# EAGLE board slipringsch (EAGLE 8.4.2)
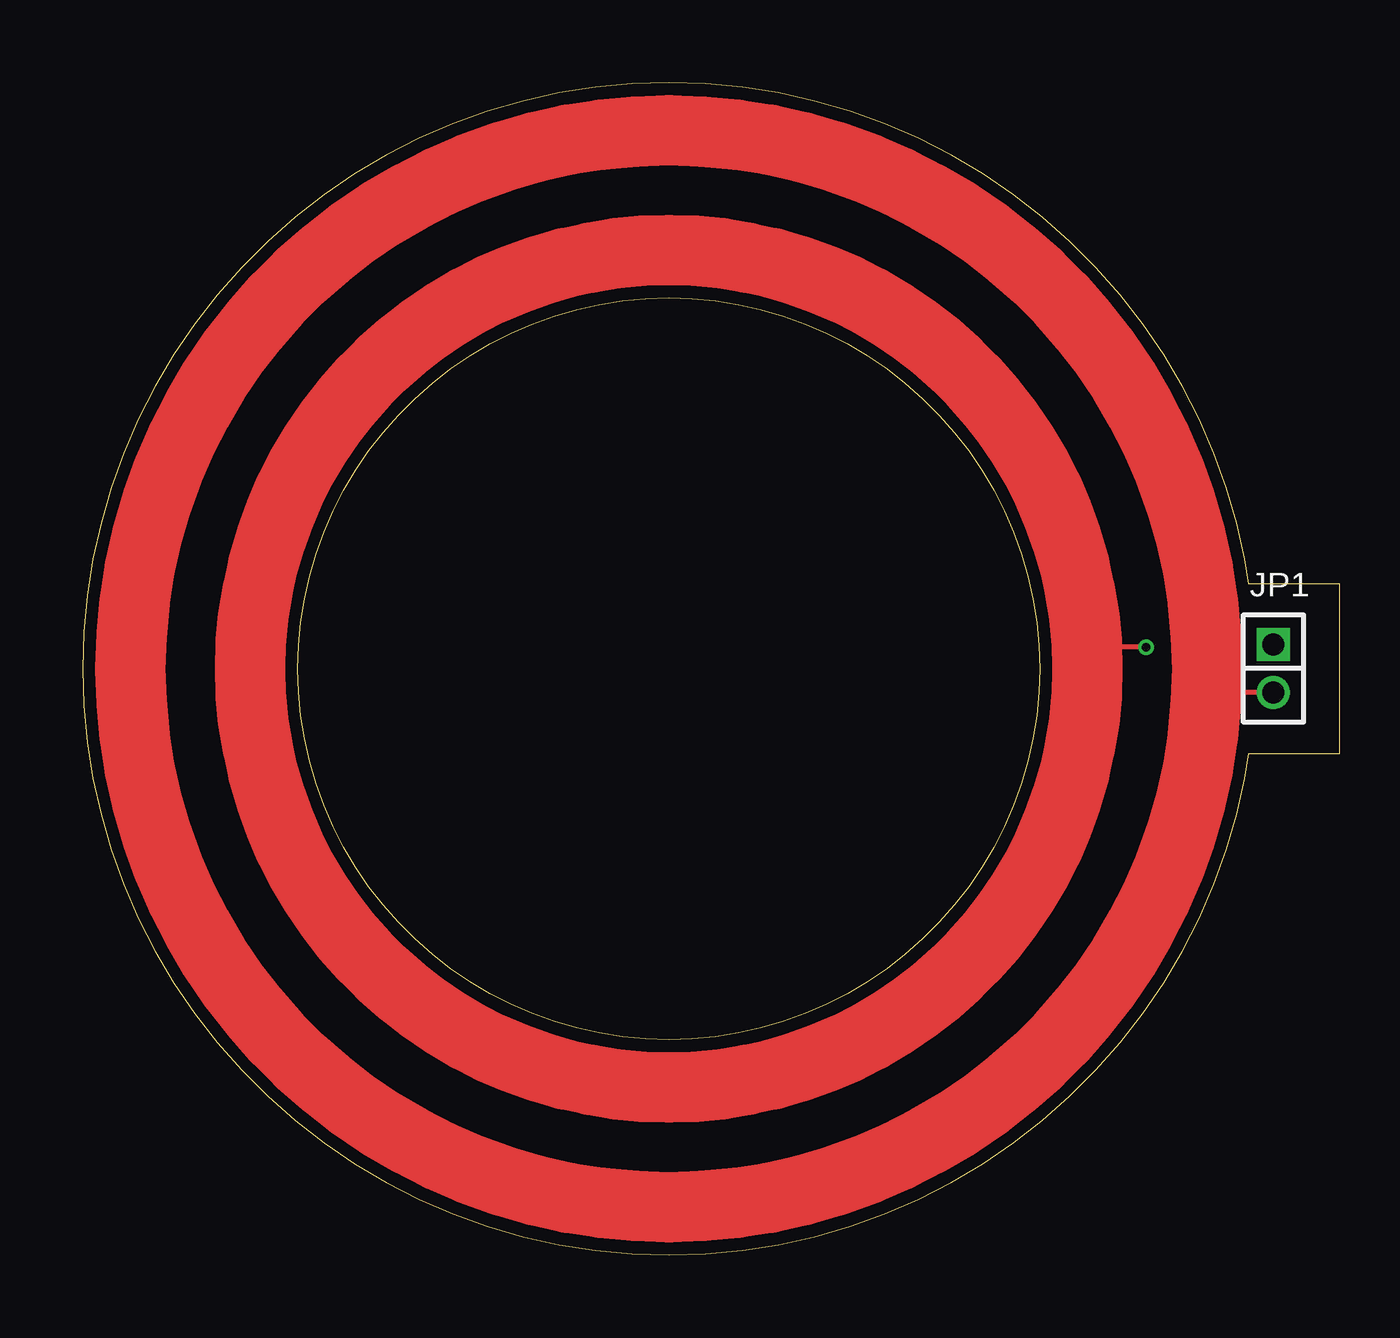
[diagram p0: board, top side]
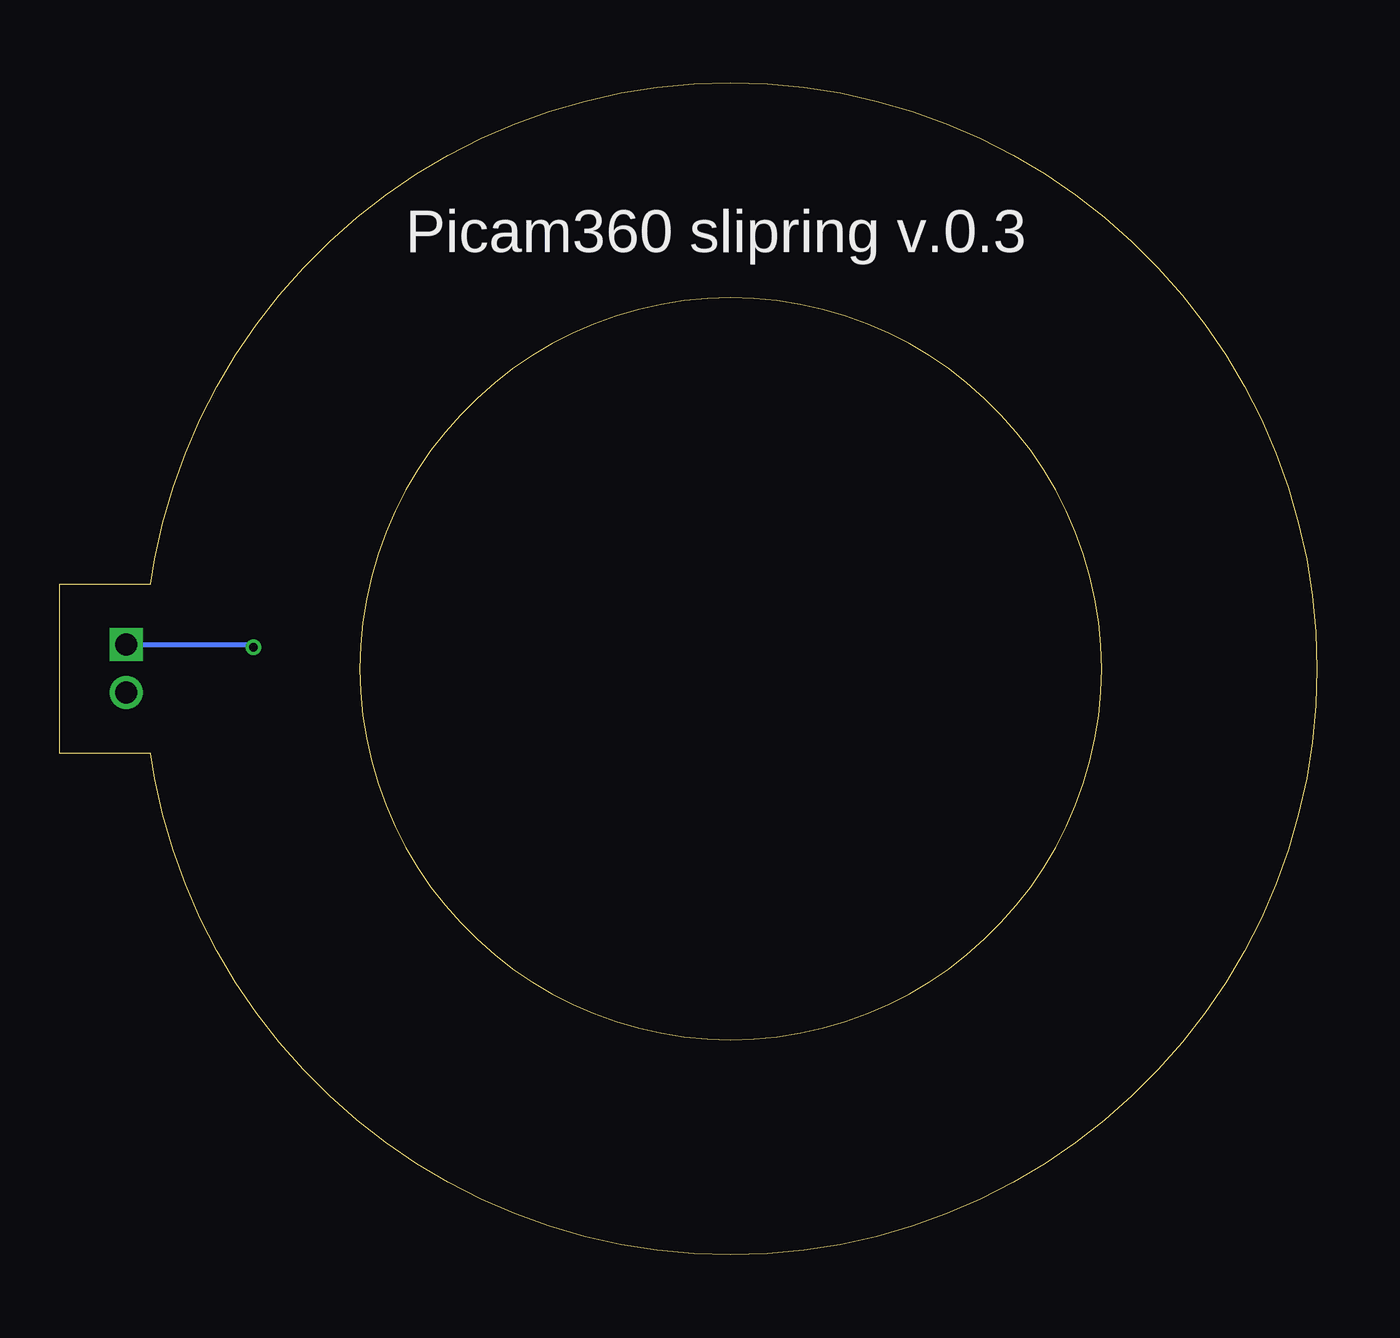
[diagram p1: board, bottom side, seen from below]

Size 52.54 x 49 mm. Coordinates in mm from the lower left corner, seen from the top.
Outline: 26.04,0.05 27.57,0.19 29.09,0.43 30.59,0.77 32.07,1.2 33.52,1.72 34.93,2.33 36.3,3.03 37.63,3.81 38.9,4.68 40.12,5.62 41.27,6.64 42.36,7.73 43.38,8.88 44.32,10.1 45.19,11.37 45.97,12.7 46.67,14.07 47.28,15.48 47.8,16.93 48.23,18.41 48.57,19.91 48.73,20.96 52.54,20.96 52.54,28.04 48.73,28.04 48.57,29.09 48.23,30.59 47.8,32.07 47.28,33.52 46.67,34.93 45.97,36.3 45.19,37.63 44.32,38.9 43.38,40.12 42.36,41.27 41.27,42.36 40.12,43.38 38.9,44.32 37.63,45.19 36.3,45.97 34.93,46.67 33.52,47.28 32.07,47.8 30.59,48.23 29.09,48.57 27.57,48.81 26.04,48.95 24.5,49 22.96,48.95 21.43,48.81 19.91,48.57 18.41,48.23 16.93,47.8 15.48,47.28 14.07,46.67 12.7,45.97 11.37,45.19 10.1,44.32 8.88,43.38 7.73,42.36 6.64,41.27 5.62,40.12 4.68,38.9 3.81,37.63 3.03,36.3 2.33,34.93 1.72,33.52 1.2,32.07 0.77,30.59 0.43,29.09 0.19,27.57 0.05,26.04 0,24.5 0.05,22.96 0.19,21.43 0.43,19.91 0.77,18.41 1.2,16.93 1.72,15.48 2.33,14.07 3.03,12.7 3.81,11.37 4.68,10.1 5.62,8.88 6.64,7.73 7.73,6.64 8.88,5.62 10.1,4.68 11.37,3.81 12.7,3.03 14.07,2.33 15.48,1.72 16.93,1.2 18.41,0.77 19.91,0.43 21.43,0.19 22.96,0.05 24.5,0 26.04,0.05
Outline: 23.53,9.03 22.56,9.12 21.6,9.28 20.64,9.49 19.71,9.76 18.79,10.09 17.9,10.47 17.03,10.92 16.2,11.41 15.39,11.96 14.62,12.56 13.89,13.2 13.2,13.89 12.56,14.62 11.96,15.39 11.41,16.2 10.92,17.03 10.47,17.9 10.09,18.79 9.76,19.71 9.49,20.64 9.28,21.6 9.12,22.56 9.03,23.53 9,24.5 9.03,25.47 9.12,26.44 9.28,27.4 9.49,28.36 9.76,29.29 10.09,30.21 10.47,31.1 10.92,31.97 11.41,32.8 11.96,33.61 12.56,34.38 13.2,35.11 13.89,35.8 14.62,36.44 15.39,37.04 16.2,37.59 17.03,38.08 17.9,38.52 18.79,38.91 19.71,39.24 20.64,39.51 21.6,39.73 22.56,39.88 23.53,39.97 24.5,40 25.47,39.97 26.44,39.88 27.4,39.73 28.36,39.51 29.29,39.24 30.21,38.91 31.1,38.52 31.97,38.08 32.8,37.59 33.61,37.04 34.38,36.44 35.11,35.8 35.8,35.11 36.44,34.38 37.04,33.61 37.59,32.8 38.08,31.97 38.52,31.1 38.91,30.21 39.24,29.29 39.51,28.36 39.73,27.4 39.88,26.44 39.97,25.47 40,24.5 39.97,23.53 39.88,22.56 39.73,21.6 39.51,20.64 39.24,19.71 38.91,18.79 38.52,17.9 38.08,17.03 37.59,16.2 37.04,15.39 36.44,14.62 35.8,13.89 35.11,13.2 34.38,12.56 33.61,11.96 32.8,11.41 31.97,10.92 31.1,10.47 30.21,10.09 29.29,9.76 28.36,9.49 27.4,9.28 26.44,9.12 25.47,9.03 24.5,9 23.53,9.03
Copper layers (1*16): Top 0.035mm / dielectric 1.6mm / Bottom 0.035mm
Design rules "Elecrow_2-layer_PCB_eagle_rule": minimum track width 6mil, minimum drill 12mil, track to track 6mil, track to pad 6mil, pad to pad 6mil, via to via 8mil, smd to smd 0mil, copper to edge 20mil, drill to drill 10mil, minimum pad ring 6mil, minimum via ring 6mil, stop-mask expansion 0mil, vias tented up to drill 100mil, thermal gap 10mil

## Footprints (pad centres in the part's own frame; a part is rotated, then mirrored left to right if it is on the bottom)
1X02M = drill 0.914 square: 1 -1,0 | drill 0.914: 2 1,0

## Placement (x,y rotation side)
JP1  [1X02M]  49.77,24.51 270 top

## Library data of the parts
JP1 = pinhead

## Nets
N1: JP1.2
P1: JP1.1

## Tracks (layer width: path | path; a pad name or v marks a point on that pad's centre or on a via)
N1
  Top 0.203: JP1.2 47.38,23.51 46.96,23.09
  Top 2.95: 25.91,2.04 27.32,2.18 28.72,2.4 30.1,2.71 31.45,3.1 32.78,3.58 34.08,4.14 35.34,4.78 36.56,5.5 37.73,6.3 38.84,7.16 39.9,8.1 40.9,9.1 41.84,10.16 42.7,11.28 43.5,12.44 44.22,13.66 44.86,14.92 45.42,16.22 45.9,17.55 46.29,18.9 46.6,20.28 46.82,21.68 46.96,23.09 47,24.5 46.96,25.91 46.82,27.32 46.6,28.72 46.29,30.1 45.9,31.45 45.42,32.78 44.86,34.08 44.22,35.34 43.5,36.56 42.7,37.73 41.84,38.84 40.9,39.9 39.9,40.9 38.84,41.84 37.73,42.7 36.56,43.5 35.34,44.22 34.08,44.86 32.78,45.42 31.45,45.9 30.1,46.29 28.72,46.6 27.32,46.82 25.91,46.96 24.5,47 23.09,46.96 21.68,46.82 20.28,46.6 18.9,46.29 17.55,45.9 16.22,45.42 14.92,44.86 13.66,44.22 12.44,43.5 11.28,42.7 10.16,41.84 9.1,40.9 8.1,39.9 7.16,38.84 6.3,37.73 5.5,36.56 4.78,35.34 4.14,34.08 3.58,32.78 3.1,31.45 2.71,30.1 2.4,28.72 2.18,27.32 2.04,25.91 2,24.5 2.04,23.09 2.18,21.68 2.4,20.28 2.71,18.9 3.1,17.55 3.58,16.22 4.14,14.92 4.78,13.66 5.5,12.44 6.3,11.28 7.16,10.16 8.1,9.1 9.1,8.1 10.16,7.16 11.28,6.3 12.44,5.5 13.66,4.78 14.92,4.14 16.22,3.58 17.55,3.1 18.9,2.71 20.28,2.4 21.68,2.18 23.09,2.04 24.5,2 25.91,2.04
P1  (via drill 0.35)
  Top 0.203: v44.45,25.4 42.16,25.4 41.97,25.6
  Top 2.95: 23.4,7.04 22.31,7.14 21.22,7.31 20.15,7.55 19.09,7.86 18.06,8.23 17.05,8.66 16.07,9.16 15.12,9.72 14.21,10.34 13.35,11.02 12.52,11.74 11.74,12.52 11.02,13.35 10.34,14.21 9.72,15.12 9.16,16.07 8.66,17.05 8.23,18.06 7.86,19.09 7.55,20.15 7.31,21.22 7.14,22.31 7.04,23.4 7,24.5 7.04,25.6 7.14,26.69 7.31,27.78 7.55,28.85 7.86,29.91 8.23,30.94 8.66,31.95 9.16,32.93 9.72,33.88 10.34,34.79 11.02,35.66 11.74,36.48 12.52,37.26 13.35,37.98 14.21,38.66 15.12,39.28 16.07,39.84 17.05,40.33 18.06,40.77 19.09,41.14 20.15,41.45 21.22,41.69 22.31,41.86 23.4,41.97 24.5,42 25.6,41.97 26.69,41.86 27.78,41.69 28.85,41.45 29.91,41.14 30.94,40.77 31.95,40.33 32.93,39.84 33.88,39.28 34.79,38.66 35.66,37.98 36.48,37.26 37.26,36.48 37.98,35.66 38.66,34.79 39.28,33.88 39.84,32.93 40.33,31.95 40.77,30.94 41.14,29.91 41.45,28.85 41.69,27.78 41.86,26.69 41.97,25.6 42,24.5 41.97,23.4 41.86,22.31 41.69,21.22 41.45,20.15 41.14,19.09 40.77,18.06 40.33,17.05 39.84,16.07 39.28,15.12 38.66,14.21 37.98,13.35 37.26,12.52 36.48,11.74 35.66,11.02 34.79,10.34 33.88,9.72 32.93,9.16 31.95,8.66 30.94,8.23 29.91,7.86 28.85,7.55 27.78,7.31 26.69,7.14 25.6,7.04 24.5,7 23.4,7.04
  Bottom 0.203: JP1.1 44.56,25.51 v44.45,25.4

## Text on the board
bPlace: Picam360 slipring v.0.3